# Altium PCB PCB1.PcbDoc
Units mm, origin at the board's own origin, x right, y up, seen from the top; angles counter-clockwise.
Board outline 89 x 90 mm, 2 copper layers (Top Layer, Bottom Layer); 46 components, 42 nets, 228 pads, 0 vias.
Unrouted connection lines stored in the file: 1.
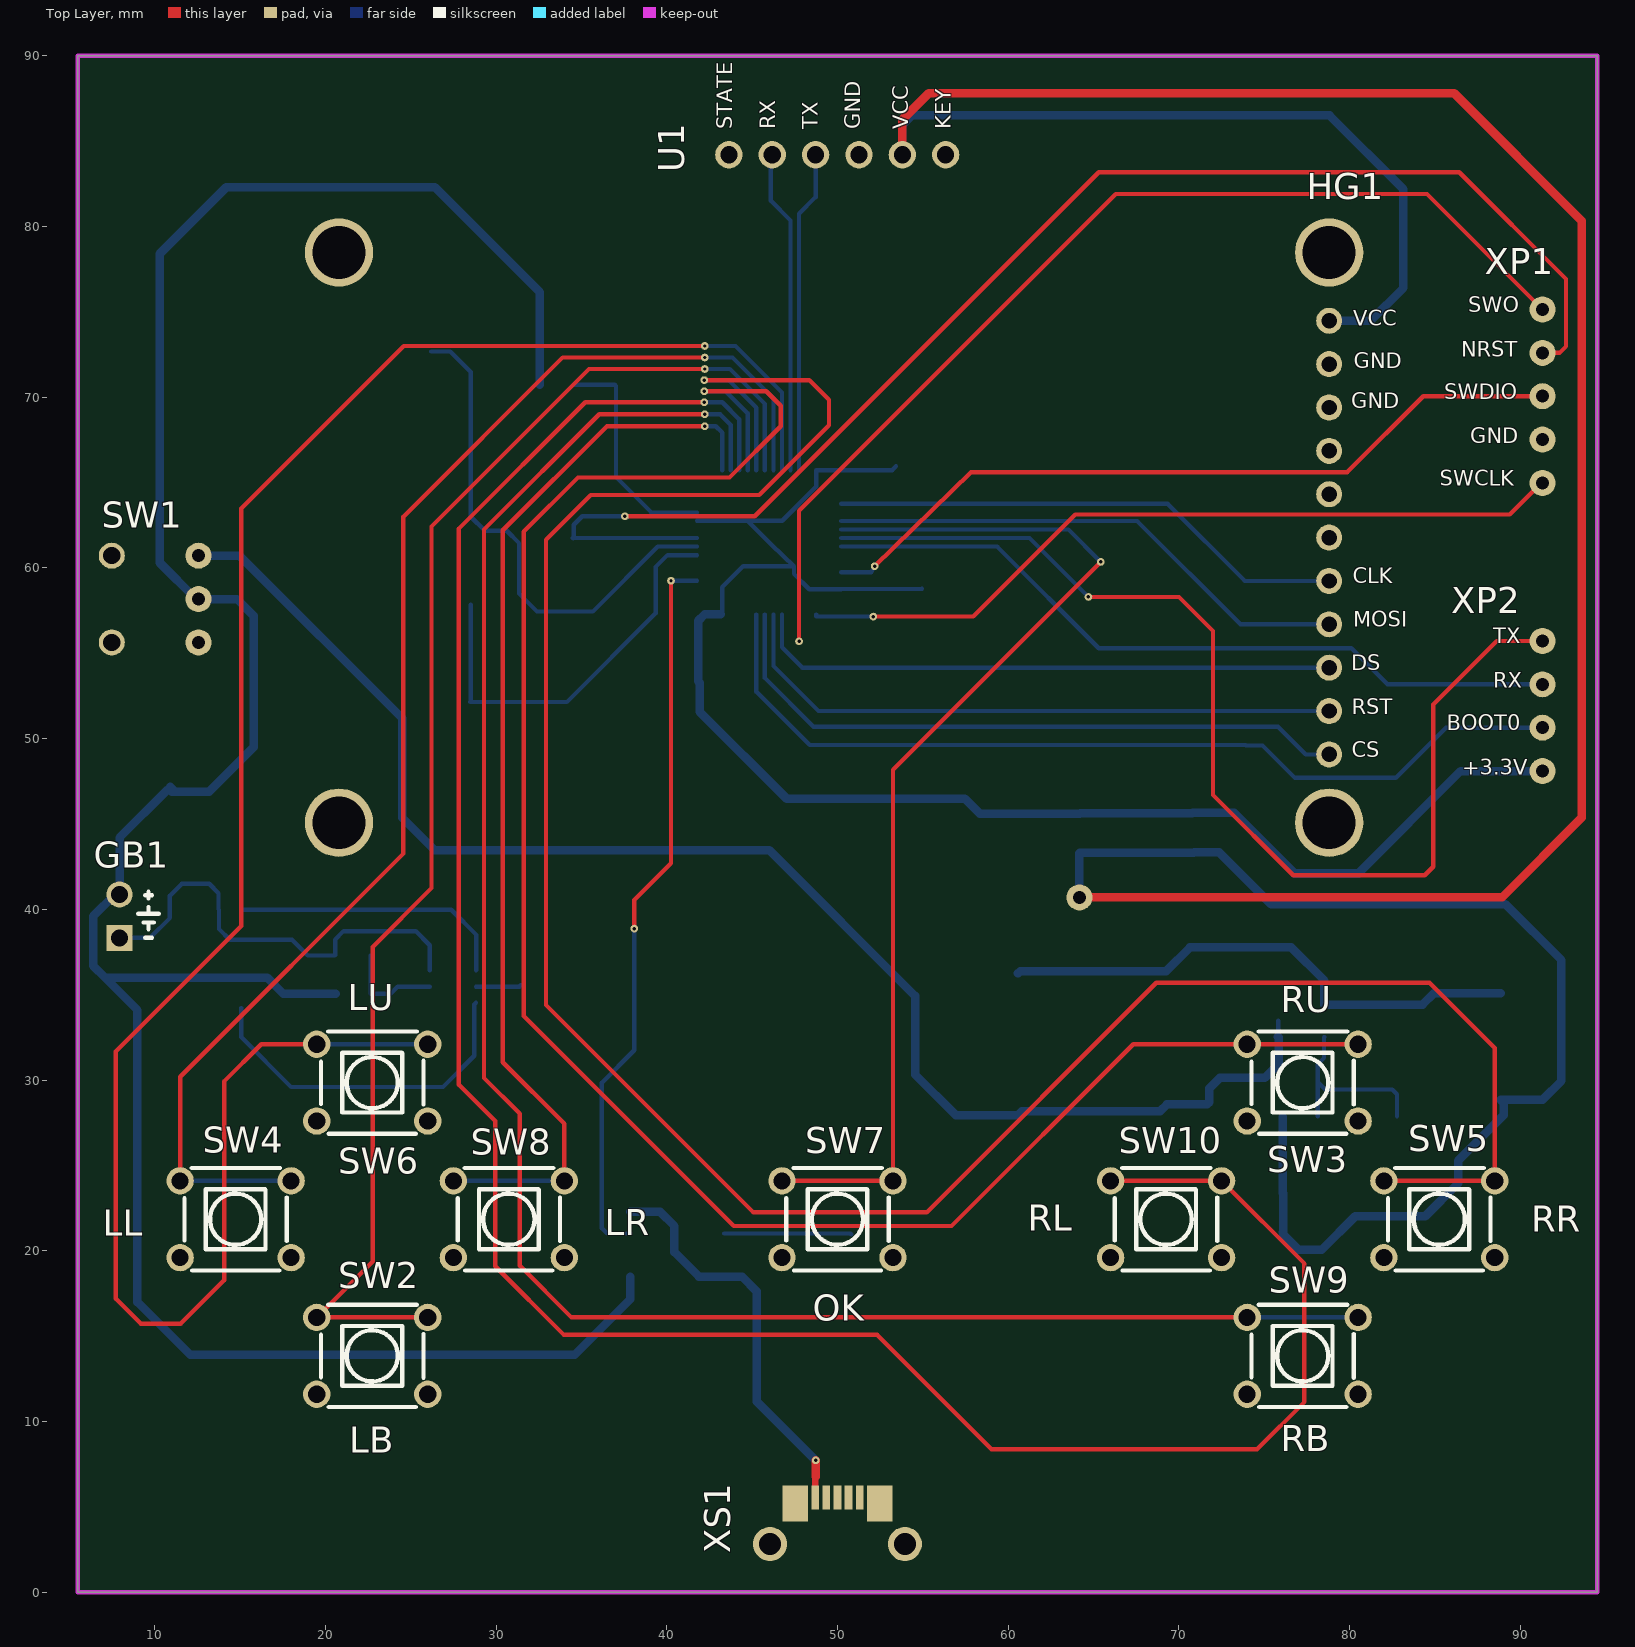
[diagram p0: Top Layer view]
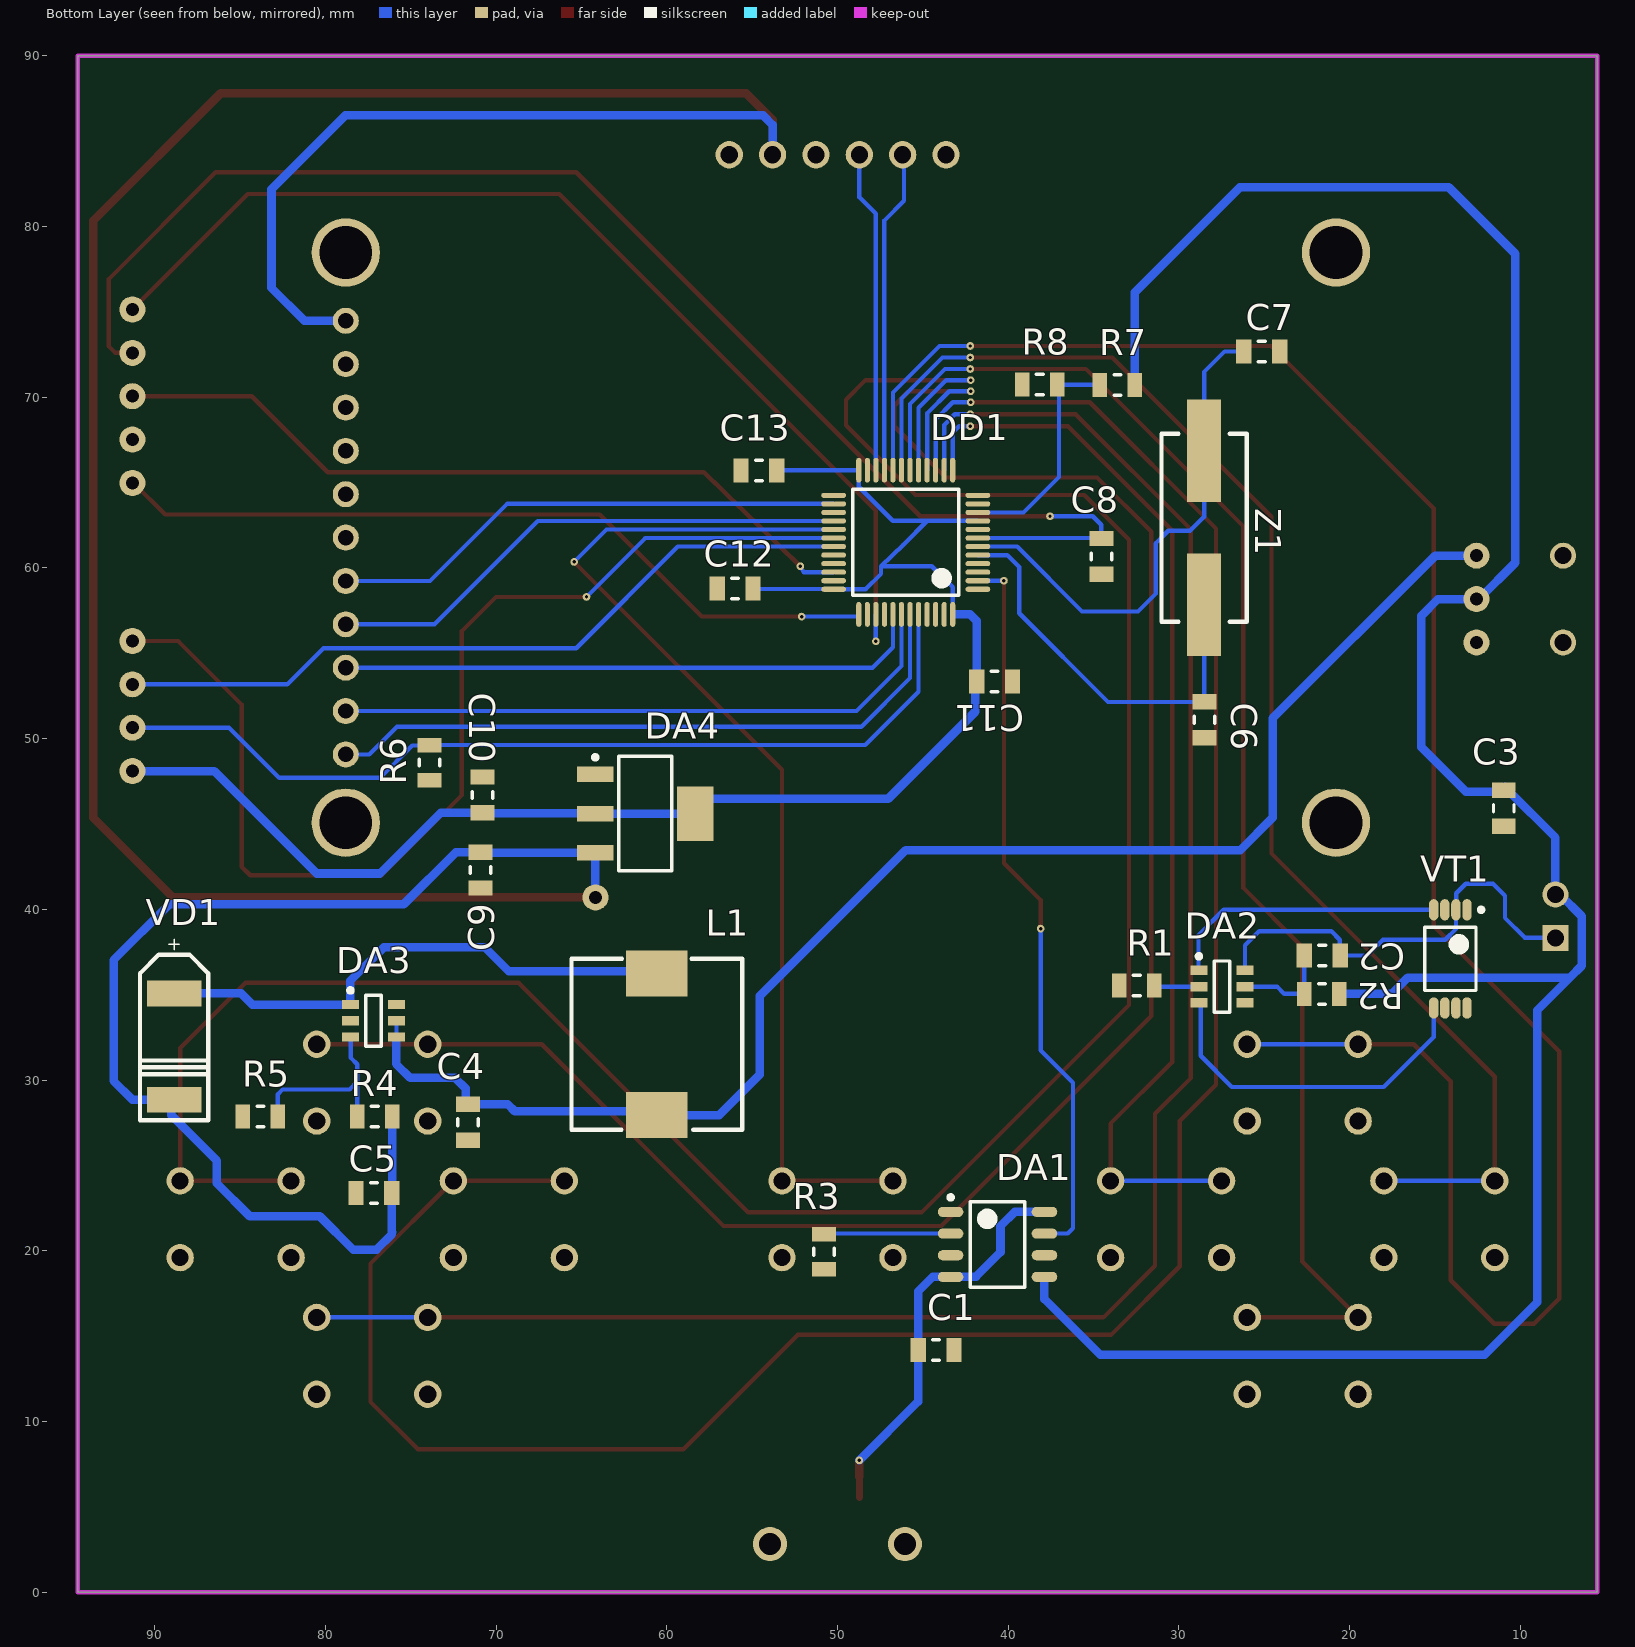
[diagram p1: Bottom Layer view, seen from below]

## Layer stack, top to bottom
Top Solder: solder mask 0.0102, Solder Resist, Dk 3.5
Top Layer: signal copper 0.0356
Dielectric 1: dielectric 0.32, FR-4, Dk 4.8
Bottom Layer: signal copper 0.0356
Bottom Solder: solder mask 0.0102, Solder Resist, Dk 3.5

## Board outline
5.5,0 5.5,90 94.5,90 94.5,0

## Design rules (kind name [scope] priority, off if disabled: settings)
BoardOutlineClearance [All] p1: gap=0.4 ignorepadtopadclearanceinfootprint=FALSE
Clearance [All] p1: gap=0.2 ignorepadtopadclearanceinfootprint=TRUE
PolygonConnect [All] p1: connectstyle=Relief reliefconductorwidth=0.254 reliefentries=4 polygonreliefangle="90 Angle" airgapwidth=0.254
RoutingVias [All] p1: holewidth=0.2 width=1.27 viastyle="Through Hole" minholewidth=0.2 minwidth=1.27 maxholewidth=0.2 maxwidth=1.27
SolderMaskExpansion [All] p1: expansion=0.102 istentingtop=FALSE
Width Width_1 [InNetClass('Power')] p1: maxlimit=0.5 minlimit=0.254 preferedwidth=0.5 checkconnectedcopper=TRUE
Width [InNetClass('AllOther')] p2: maxlimit=0.254 minlimit=0.254 preferedwidth=0.254
30 further rules are at their usual default settings.

## Classes and differential pairs
net class AllOther: NetC2_1 NetC2_2 NetC4_2 NetC6_2 NetC7_2 NetC8_2 NetDA1_2 NetDA1_7 NetDA2_1 NetDA2_2 NetDA2_3 NetDA3_1 NetDA3_3 NetDD1_10 NetDD1_13 NetDD1_14 NetDD1_15 NetDD1_16 NetDD1_17 NetDD1_18 NetDD1_19 NetDD1_20 NetDD1_21 NetDD1_22 NetDD1_26 NetDD1_28 NetDD1_29 NetDD1_30 NetDD1_31 NetDD1_34 NetDD1_37 NetDD1_39 NetDD1_41 NetDD1_42 NetDD1_44 NetVT1_1
net class Power: GND NetC1_2 NetC3_2 NetC4_2 NetC5_2 NetC10_2 NetDA3_1
component class Sheet3: C1 C2 C3 C4 C5 C6 C7 C8 C9 C10 C11 C12 C13 DA1 DA2 DA3 DA4 DD1 GB1 L1 R1 R2 R3 R4 R5 R6 R7 R8 SW1 SW2 SW3 SW4 SW5 SW6 SW7 SW8 SW9 SW10 U1 VD1 VT1 XS1 Z1
component class Sheet1: HG1 XP1 XP2

## Components (designator, comment, footprint, x,y, rotation, side; value= is the part's Value field where it differs from the comment)
C1 "0.1uF" CAPC2112X13N 44.225,14.2 r0 bottom
C2 "0.1uF" CAPC2112X13N 21.6,37.3 r0 bottom
C3 "10uF" CAPC2112X13N 10.975,45.925 r90 bottom
C4 "22uF" CAPC2112X13N 71.65,27.525 r90 bottom
C5 "22uF" CAPC2112X13N 77.15,23.375 r180 bottom
C6 "22pF" CAPC2112X13N 28.5,51.1 r90 bottom
C7 "22pF" CAPC2112X13N 25.15,72.675 r0 bottom
C8 "0.1uF" CAPC2112X13N 34.525,60.675 r90 bottom
C9 "10uF" CAPC2112X13N 70.9,42.3 r90 bottom
C10 "10uF" CAPC2112X13N 70.8,46.7 r270 bottom
C11 "0.1uF" CAPC2112X13N 40.8,53.35 r0 bottom
C12 "0.1uF" CAPC2112X13N 56,58.8 r180 bottom
C13 "0.1uF" CAPC2112X13N 54.6,65.7 r180 bottom
DA1 "TP4056" SOP127P600X173-8N 40.625,20.375 r180 bottom
DA2 "DA?" SOT-23-6 27.475,35.475 r180 bottom
DA3 "MT3608" SOT-23-6 77.175,33.475 r180 bottom
DA4 "NCP1117" SOT230P700X180-4N 61.262,45.606 r180 bottom
DD1 "STM32F103C8T6 (LQFP48)" TSQFP50P900X900X160-48N 46,61.5 r0 bottom
GB1 "Batt Li-On" BATT 7.95,38.335 r0 top
HG1 "TFT_SPI" LCD_TFT_SPI 78.8,45.075 r0 top locked
L1 "22uH" "inductor SMD" 60.575,27.95 r90 bottom
R1 "1k" RESC2113X06N 32.475,35.55 r0 bottom
R2 "100" RESC2113X06N 21.625,35.05 r0 bottom
R3 "1.2k" RESC2113X06N 50.8,19.95 r90 bottom
R4 "Резистор 0805" RESC2113X06N 77.1,27.875 r180 bottom
R5 "Резистор 0805" RESC2113X06N 83.8,27.875 r180 bottom
R6 "100k" RESC2113X06N 73.9,48.6 r90 bottom
R7 "47k" RESC2113X06N 33.6,70.725 r180 bottom
R8 "47k" RESC2113X06N 38.15,70.75 r180 bottom
SW1 "SWITCH" Switch 7.495,55.635 r0 top
SW2 "Button" PCBComponent_1 19.5,11.6 r0 top
SW3 "Button" PCBComponent_1 74,27.6 r0 top
SW4 "Button" PCBComponent_1 11.5,19.6 r0 top
SW5 "Button" PCBComponent_1 82,19.6 r0 top
SW6 "Button" PCBComponent_1 19.5,27.6 r0 top
SW7 "Button" PCBComponent_1 46.75,19.6 r0 top
SW8 "Button" PCBComponent_1 27.5,19.6 r0 top
SW9 "Button" PCBComponent_1 74,11.6 r0 top
SW10 "Button" PCBComponent_1 66,19.6 r0 top
U1 "HC-05" HC-05 56.34,84.2 r90 top locked
VD1 "SS34" SS34 88.85,28.85 r90 bottom
VT1 "FS8205A(MOSFET,TSSOP-8)" TSOP65P600X120-8N 14.1,37.1 r270 bottom
XP1 "SWD" SWD 91.3,64.975 r90 top
XP2 "UART" UART 91.3,48.1 r90 top
XS1 "USB" USB_Type2 53.95,2.825 r90 top
Z1 "Quartz" HC-49SM 28.525,57.85 r90 bottom

## Footprints (in the part's own frame and the unit in brackets; to place one, negate y for a bottom-side part, rotate by r counter-clockwise, add the part's x,y. Pads: shape width x height; smd on the part's side, far side on the other; paste and mask are expansions set on the pad)
BATT [mil]
  round 60 hole 39.37: 1(0,100)
  rect 60x60 hole 39.37: 2(0,0)
  silkscreen extent 43,0 91,106
CAPC2112X13N [mm] "Chip Capacitor, 2-Leads, Body 2,10x1,25mm, IPC Medium Density"
  rect 0.9x1.4 smd: 1(-1.05,0) 2(1.05,0)
  silkscreen extent -0.2,-0.6 0.2,0.6, body extent -1.1,-0.63 1.1,0.63, height 1.3
HC-05 [mm]
  round 1.6 hole 1: 1(0,12.7) 2(0,10.16) 3(0,7.62) 4(0,5.08) 5(0,2.54) 6(0,0)
HC-49SM [mm]
  rect 6x2 smd: 1(0,0) 2(9,0)
  silkscreen extent -1,-2.5 10,2.5
"inductor SMD" [mm]
  rect 2.7x3.6 smd: 1(0,0) 2(8.3,0)
  silkscreen extent -0.85,-5 9.15,5
LCD_TFT_SPI [mm]
  round 1.524 hole 0.9: 1(0,29.4) 2(0,24.32) 2(0,26.86) 3(0,14.16) 4(0,11.62) 5(0,9.08) 6(0,6.54) 7(0,4) 10(0,16.7) 10(0,19.24) 87(0,21.78)
  round 4 hole 3.1: 90(-58,0) 90(-58,33.4)
  round 4 hole 3.1 unplated: 90(0,0) 90(0,33.4)
PCBComponent_1 [mm]
  round 1.6 hole 1: 1(0,0) 1(6.5,0) 2(0,4.5) 2(6.5,4.5)
  silkscreen extent 0.25,-0.75 6.25,5.25
RESC2113X06N [mm] "Chip Resistor, 2-Leads, Body 2,10x1,30mm, IPC Medium Density"
  rect 0.85x1.4 smd: 1(-1.025,0) 2(1.025,0)
  silkscreen extent -0.2,-0.6 0.2,0.6, body extent -1.1,-0.7 1.1,0.7, height 0.55
SOP127P600X173-8N [mm] "SOP, 8-Leads, Body 4,90x3,91mm, Pitch 1,27mm, IPC Medium Density"
  oval 1.5x0.6 smd: 1(-2.75,1.905) 2(-2.75,0.635) 3(-2.75,-0.635) 4(-2.75,-1.905) 5(2.75,-1.905) 6(2.75,-0.635) 7(2.75,0.635) 8(2.75,1.905)
  silkscreen extent -2.88,-2.5 1.6,2.88, body extent -2,-2.5 2,2.5, height 1.73
SOT230P700X180-4N [mm] "SOT223, 4-Leads, Body 6,50x7,00mm (avg), Pitch 2,30mm, IPC Medium Density"
  rect 2.15x0.9 smd: 1(-2.925,-2.3) 2(-2.925,0) 3(-2.925,2.3)
  rect 2.15x3.2 smd: 2(2.925,0)
  silkscreen extent -3.05,-3.35 1.55,3.42, body extent -3.5,-3.35 3.5,3.35, height 1.8
SOT-23-6 [mm] "SOT23, 6-Leads, Body 2,85x2,80mm, Pitch 0,95mm, IPC Medium Density"
  rect 1x0.55 smd: 1(-1.35,0.95) 2(-1.35,0) 3(-1.35,-0.95) 4(1.35,-0.95) 5(1.35,0) 6(1.35,0.95)
  silkscreen extent -1.48,-1.5 0.45,1.9, body extent -0.85,-1.5 0.85,1.5, height 1.35
SS34 [mm]
  rect 1.52x3.2 smd: 1(6.225,0) 2(0,0)
  silkscreen extent -1.2,-2 9.4,2
SWD [mil]
  round 60 hole 30: 0(0,0) 1(100,0) 2(200,0) 3(300,0) 4(400,0)
Switch [mil]
  round 60 hole 30: 1(200,100) 2(200,200) 3(200,0)
  round 60 hole 39.37: 94(0,0) 94(0,200)
TSOP65P600X120-8N [mm] "TSOP, 8-Leads, Body 2,93x4,40mm, Pitch 0,65mm, IPC Medium Density"
  oval 1.25x0.55 smd: 1(-2.875,0.975) 1(2.875,0.975) 2(-2.875,0.325) 3(-2.875,-0.325) 4(-2.875,-0.975) 5(2.875,-0.975) 6(2.875,-0.325) 7(2.875,0.325)
  silkscreen extent -3,-1.5 1.85,1.92, body extent -2.25,-1.5 2.25,1.5, height 1.2
TSQFP50P900X900X160-48N [mm] "TSQFP, 48-Leads, Body 7,00x7,00mm, Pitch 0,50mm, IPC Medium Density"
  oval 1.45x0.3 smd: 1(-4.225,2.75) 2(-4.225,2.25) 3(-4.225,1.75) 4(-4.225,1.25) 5(-4.225,0.75) 6(-4.225,0.25) 7(-4.225,-0.25) 8(-4.225,-0.75) 9(-4.225,-1.25) 10(-4.225,-1.75) 11(-4.225,-2.25) 12(-4.225,-2.75) 25(4.225,-2.75) 26(4.225,-2.25) 27(4.225,-1.75) 28(4.225,-1.25) 29(4.225,-0.75) 30(4.225,-0.25) 31(4.225,0.25) 32(4.225,0.75) 33(4.225,1.25) 34(4.225,1.75) 35(4.225,2.25) 36(4.225,2.75)
  oval 0.3x1.45 smd: 13(-2.75,-4.225) 14(-2.25,-4.225) 15(-1.75,-4.225) 16(-1.25,-4.225) 17(-0.75,-4.225) 18(-0.25,-4.225) 19(0.25,-4.225) 20(0.75,-4.225) 21(1.25,-4.225) 22(1.75,-4.225) 23(2.25,-4.225) 24(2.75,-4.225) 37(2.75,4.225) 38(2.25,4.225) 39(1.75,4.225) 40(1.25,4.225) 41(0.75,4.225) 42(0.25,4.225) 43(-0.25,4.225) 44(-0.75,4.225) 45(-1.25,4.225) 46(-1.75,4.225) 47(-2.25,4.225) 48(-2.75,4.225)
  silkscreen extent -3.1,-3.1 3.1,3.1, body extent -3.5,-3.5 3.5,3.5, height 1.6
UART [mil]
  round 60 hole 30: 0(100,0) 1(0,0) 2(300,0) 3(200,0)
USB_Type2 [mm]
  rect 1.38x0.45 smd: 1(2.725,5.25) 2(2.725,4.6) 3(2.725,3.95) 4(2.725,3.3) 5(2.725,2.65)
  round 2 hole 1.3 unplated: 5(0,7.9) 5(0,0)
  rect 2.1x1.475 smd: 5(2.375,6.425) 5(2.375,1.475)

## Part data
C3 C4 C5 C6 C7 C9 C10: library part 0.1uF
DA2: library part DW01A
DA3: "DC-DC Up converter (SOT23-6)"
L1: library part Inductor
R1 R2 R3 R6 R7 R8: library part "Резистор 0805"
VD1: "Диод Шоттки 3A 40V"
VT1: "N-Channel MOSFET TSSOP-8"

## Free pads (board coordinates)
  round 0.45 hole 0.2: 96(37.55,63.025) 96(38.1,38.875) 96(40.25,59.25) 96(42.2,69.7) 96(42.2,70.35) 96(42.2,71) 96(42.225,71.65) 96(42.225,68.3) 96(42.225,69) 96(42.225,72.325) 96(42.225,73) 96(47.75,55.7) 96(48.725,7.725) 96(52.1,57.15) 96(52.175,60.1) 96(64.7,58.3) 96(65.425,60.35)
  round 1.524 hole 0.762: 98(64.175,40.7)

## Nets (pads, with @x,y where several pads share a name; then routed paths per layer and width w, separated by ;. In a path a pad name is that pad's centre, name@x,y a point inside that pad or via, vN(x,y) a via of type N, cw(c..) or ccw(c..) an arc to the next point about the centre after c; other vN are vias at no path point)
GND: C1.1 C3.1 C4.1 C5.1 C6.1 C7.1 C8.1 C9.1 C10.1 C11.1 C12.1 C13.1 DA1.1 DA1.3 DA3.2 DA4.3 DD1.8 DD1.23 DD1.35 DD1.47 HG1.2 HG1.90 R1.2 R3.1 R5.1 R6.1 R8.1 SW1.94 SW2.1 SW3.1 SW4.1 SW5.1 SW6.1 SW7.1 SW8.1 SW9.1 SW10.1 U1.4 VT1.6 XP1.1 XS1.5
NetC1_2: C1.2 DA1.4 DA1.8 pad.96@48.725,7.725 XS1.1 | length 23.7
  Top Layer w0.254: XS1.1 XS1.1@48.712,5.562 ; pad.96@48.712,7.712 pad.96@48.725,7.725
  Top Layer w0.4: XS1.1 48.7,6.75
  Top Layer w0.5: 48.725,6.769 pad.96@48.725,7.725
  Bottom Layer w0.5: DA1.8 39.62,22.28 40.45,21.45 40.45,19.925 41.886,18.489 43.356,18.489 DA1.4 44.43,18.47 45.275,17.625 C1.2 45.275,11.175 pad.96@48.725,7.725
NetC2_1: C2.1 DA2.6 GB1.2 VT1.2 | length 26.1
  Bottom Layer w0.254: GB1.2 9.735,38.335 10.9,39.5 10.9,40.8 11.6,41.5 13.2,41.5 13.75,40.95 13.75,40 VT1.2 13.775,38.85 14.4,38.225 18.05,38.225 18.975,37.3 C2.1 20.575,37.325 20.575,38.225 21.075,38.725 25.3,38.725 26.125,37.9 DA2.6
NetC2_2: C2.2 DA2.5 R2.2 | length 5.9
  Bottom Layer w0.254: C2.2 R2.2 23.825,35.05 24.25,35.475 DA2.5
NetC3_2: C3.2 DA1.5 GB1.1 R2.1 R7.2 SW1.1 | length 150.8
  Bottom Layer w0.5: C3.2@10.925,47.175 11.1,47 10.95,47 C3.2@10.925,46.975 ; C3.2 C3.2@10.925,46.975 ; R2.1 17.55,35.05 16.6,36 7.1,36 ; R7.2 32.575,76.15 26.425,82.3 14.2,82.3 10.3,78.4 10.3,60.3 12.425,58.175 SW1.1 14.825,58.175 15.8,57.2 15.8,49.5 13.2,46.9 11,46.9 C3.2@10.925,46.975 ; DA1.5 37.875,17.175 34.6,13.9 12.1,13.9 9,17 9,34.1 7.1,36 ; 7.1,36 6.4,36.7 6.4,39.6 7.675,40.875 GB1.1 7.95,44.2 10.725,46.975 C3.2@10.925,46.975
NetC4_2: C4.2 DA3.4 DA3.5 L1.1 SW1.2 | length 87.2
  Bottom Layer w0.254: DA3.4 DA3.5
  Bottom Layer w0.5: SW1.2 14.985,60.715 24.5,51.2 24.5,45.375 26.4,43.475 43.875,43.475 46,43.475 54.55,34.925 54.55,30.325 56.925,27.95 L1.1 60.8,28.175 68.9,28.175 69.3,28.575 C4.2 71.775,28.7 71.775,29.507 72.393,30.125 75.025,30.125 75.85,30.95 75.85,32.5 DA3.4 DA3.4@75.8,32.55
NetC5_2: C5.2 C9.2 DA4.1 HG1.1 pad.98 R4.2 U1.5 VD1.2 | length 225.7
  Top Layer w0.5: U1.5 53.8,86.25 55.35,87.8 86.125,87.8 93.6,80.325 93.6,45.375 88.925,40.7 pad.98
  Bottom Layer w0.5: U1.5 53.8,85.95 54.35,86.5 78.825,86.5 83.15,82.175 83.15,76.4 81.225,74.475 HG1.1 ; pad.98 64.175,43.295 DA4.1 64.208,43.328 70.878,43.328 C9.2 72.35,43.35 75.4,40.3 89.125,40.3 92.4,37.025 92.4,29.95 91.3,28.85 VD1.2 89.025,28.675 89.025,27.95 86.35,25.275 86.35,23.95 84.425,22.025 80.325,22.025 78.375,20.075 77,20.075 76.1,20.975 C5.2 ; 76.075,21.1 76.087,21.087 ; C5.2@76.087,23.388 R4.2@76.087,27.862
NetC6_2: C6.2 DD1.5 Z1.1 | length 24.1
  Bottom Layer w0.254: Z1.1 28.525,52.175 C6.2 34.15,52.15 39.35,57.35 39.35,60.05 40.05,60.75 DD1.5
NetC7_2: C7.2 DD1.6 Z1.2 | length 30.1
  Bottom Layer w0.254: C7.2 27.325,72.675 28.525,71.475 Z1.2 28.525,63 29.35,62.175 30.626,62.175 31.35,61.451 31.35,58.5 32.4,57.45 35.675,57.45 39.475,61.25 DD1.6
NetC8_2: C8.2 DD1.7 pad.96@37.55,63.025 XP1.3 | length 82.8
  Top Layer w0.254: pad.96@37.55,63.025 45.15,63.025 65.3,83.175 86.425,83.175 92.675,76.925 92.675,72.975 92.295,72.595 XP1.3
  Bottom Layer w0.254: C8.2@34.5,61.75 C8.2 C8.2@34.55,61.75 ; pad.96@37.55,63.025 35.05,63.025 34.55,62.525 C8.2@34.55,61.75 ; DD1.7 C8.2@34.55,61.75
NetC10_2: C10.2 C11.2 C12.2 C13.2 DA4.2 DD1.9 DD1.24 DD1.36 DD1.48 XP2.1 | length 94.6
  Bottom Layer w0.254: DD1.9@41.775,62.762 44.738,62.762 ; DD1.48 43.25,58.875 44.475,60.1 47.45,60.1 ; C13.2@53.425,65.95 53.2,65.725 DD1.24 48.75,64.75 46.762,62.762 44.738,62.762 ; C12.2@54.95,58.775 DD1.36 48.35,58.75 47.45,59.65 47.45,60.1 ; 44.738,62.762 46.137,61.363 47.45,60.1
  Bottom Layer w0.5: DD1.48@43.15,57.275 42.218,57.275 41.85,56.907 C11.2 41.925,53.275 41.925,51.575 47.025,46.475 57.468,46.475 58.337,45.606 64.187,45.606 64.208,45.628 70.778,45.628 C10.2 73.25,45.65 76.8,42.1 80.5,42.1 86.5,48.1 XP2.1
NetDA1_2: DA1.2 R3.2 | length 7.4
  Bottom Layer w0.254: DA1.2 50.765,21.01 R3.2
NetDA1_7: DA1.7 DD1.2 pad.96@38.1,38.875 pad.96@40.25,59.25 | length 42.9
  Top Layer w0.254: pad.96@38.1,38.875 38.1,40.55 40.25,42.7 pad.96@40.25,59.25
  Bottom Layer w0.254: DA1.7 36.515,21.01 36.2,21.325 36.2,29.85 38.1,31.75 pad.96@38.1,38.875 ; pad.96@40.25,59.25 DD1.2
NetDA2_1: DA2.1 VT1.4 | length 16.5
  Bottom Layer w0.254: VT1.4 27.375,39.975 28.85,38.5 28.85,36.45 DA2.1
NetDA2_2: DA2.2 R1.1 | length 2.7
  Bottom Layer w0.254: DA2.2 31.375,35.475 R1.1
NetDA2_3: DA2.3 VT1.5 | length 20.5
  Bottom Layer w0.254: VT1.5 15.075,32.525 18,29.6 26.9,29.6 28.725,31.425 28.725,34.425 DA2.3
NetDA3_1: DA3.1 L1.2 VD1.1 | length 31.4
  Bottom Layer w0.5: L1.2 60.712,36.387 69.263,36.387 70.65,37.775 76.575,37.775 78.525,35.825 DA3.1 84.275,34.425 84.925,35.075 VD1.1
NetDA3_3: DA3.3 R4.1 R5.2 | length 11.1
  Bottom Layer w0.254: R4.1 78.125,29.9 ; DA3.3 78.5,32.5 78.5,31.3 78.125,30.925 78.125,29.9 ; R5.2 82.775,29.175 82.5,29.45 78.575,29.45 78.125,29.9
NetDD1_10: DD1.10 R7.1 R8.2 | length 13.4
  Bottom Layer w0.254: R7.1 36.95,70.725 37.025,70.65 37.025,65.325 39.1,63.25 DD1.10
NetDD1_13: DD1.13 pad.96@42.225,68.3 SW8.2 | length 63.8
  Top Layer w0.254: SW8.2@34,24.1 34,27.45 30.4,31.05 30.4,62.2 36.5,68.3 pad.96@42.225,68.3
  Bottom Layer w0.254: SW8.2@27.5,24.1 SW8.2@34,24.1 ; pad.96@42.225,68.3 42.875,68.3 43.25,67.925 DD1.13
NetDD1_14: DD1.14 pad.96@42.225,69 SW9.2 | length 114.5
  Top Layer w0.254: pad.96@42.225,69 36.05,69 29.3,62.25 29.3,30.125 31.4,28.025 31.4,19.125 34.425,16.1 SW9.2@74,16.1
  Bottom Layer w0.254: pad.96@42.225,69 43.125,69 43.75,68.375 DD1.14 ; SW9.2@74,16.1 SW9.2@80.5,16.1
NetDD1_15: DD1.15 pad.96@42.2,69.7 SW10.2 | length 141.4
  Top Layer w0.254: pad.96@42.2,69.7 35.225,69.7 27.825,62.3 27.825,29.725 29.95,27.6 29.95,19.1 33.975,15.075 52.325,15.075 59.025,8.375 74.575,8.375 77.35,11.15 77.35,19.25 72.5,24.1 SW10.2@66,24.1
  Bottom Layer w0.254: pad.96@42.2,69.7 43.25,69.7 44.25,68.7 DD1.15
NetDD1_16: DD1.16 pad.96@42.2,70.35 SW3.2 | length 116.8
  Top Layer w0.254: pad.96@42.2,70.35 45.825,70.35 46.675,69.5 46.675,68.3 43.675,65.3 34.8,65.3 31.625,62.125 31.625,33.75 43.925,21.45 56.675,21.45 67.325,32.1 74,32.1 SW3.2@80.5,32.1
  Bottom Layer w0.254: pad.96@42.2,70.35 43.45,70.35 44.75,69.05 DD1.16
NetDD1_17: DD1.17 pad.96@42.2,71 SW5.2 | length 145.3
  Top Layer w0.254: pad.96@42.2,71 48.35,71 49.5,69.85 49.5,68.35 45.425,64.275 35.55,64.275 32.925,61.65 32.925,34.4 45.075,22.25 55.225,22.25 68.675,35.7 84.675,35.7 88.5,31.875 88.5,24.1 SW5.2@82,24.1
  Bottom Layer w0.254: pad.96@42.2,71 43.625,71 45.25,69.375 DD1.17
NetDD1_18: DD1.18 pad.96@42.225,71.65 SW2.2 | length 83.7
  Top Layer w0.254: SW2.2@26,16.1 19.5,16.1 22.775,19.375 22.775,37.8 26.225,41.25 26.225,62.425 35.45,71.65 pad.96@42.225,71.65
  Bottom Layer w0.254: pad.96@42.225,71.65 43.7,71.65 45.75,69.6 DD1.18
NetDD1_19: DD1.19 pad.96@42.225,72.325 SW4.2 | length 81.5
  Top Layer w0.254: SW4.2@11.5,24.1 11.5,30.2 24.575,43.275 24.575,63 33.9,72.325 pad.96@42.225,72.325
  Bottom Layer w0.254: SW4.2@11.5,24.1 SW4.2@18,24.1 ; pad.96@42.225,72.325 43.85,72.325 46.25,69.925 DD1.19
NetDD1_20: DD1.20 pad.96@42.225,73 SW6.2 | length 123.1
  Top Layer w0.254: SW6.2@19.5,32.1 16.25,32.1 14.075,29.925 14.075,18.275 11.525,15.725 9.2,15.725 7.725,17.2 7.725,31.675 15.075,39.025 15.075,63.475 24.6,73 pad.96@42.225,73
  Bottom Layer w0.254: SW6.2@19.5,32.1 SW6.2@26,32.1 ; pad.96@42.225,73 44.025,73 46.75,70.275 DD1.20
NetDD1_21: DD1.21 U1.2 | length 19
  Bottom Layer w0.254: U1.2 46.1,84.12 46.1,81.5 47.25,80.35 DD1.21
NetDD1_22: DD1.22 U1.3 | length 18.9
  Bottom Layer w0.254: DD1.22 47.75,80.75 48.72,81.72 U1.3
NetDD1_26: DD1.26 HG1.3 | length 30.4
  Bottom Layer w0.254: DD1.26 69.35,63.75 73.865,59.235 HG1.3
NetDD1_28: DD1.28 HG1.4 | length 31.1
  Bottom Layer w0.254: DD1.28 67.55,62.75 73.605,56.695 HG1.4
NetDD1_29: DD1.29 pad.96@65.425,60.35 SW7.2 | length 63.8
  Top Layer w0.254: SW7.2@46.75,24.1 53.25,24.1 53.25,48.175 pad.96@65.425,60.35
  Bottom Layer w0.254: DD1.29 63.525,62.25 pad.96@65.425,60.35
NetDD1_30: DD1.30 pad.96@64.7,58.3 XP2.2 | length 66.1
  Top Layer w0.254: pad.96@64.7,58.3 70,58.3 72,56.3 72,46.7 76.7,42 84.4,42 84.9,42.5 84.9,52 88.62,55.72 XP2.2
  Bottom Layer w0.254: DD1.30 61.25,61.75 pad.96@64.7,58.3
NetDD1_31: DD1.31 XP2.3 | length 44.4
  Bottom Layer w0.254: DD1.31 59.35,61.25 65.3,55.3 80.1,55.3 82.22,53.18 XP2.3
NetDD1_34: DD1.34 pad.96@52.175,60.1 XP1.2 | length 45.4
  Top Layer w0.254: pad.96@52.175,60.1 57.825,65.6 79.85,65.6 84.305,70.055 XP1.2
  Bottom Layer w0.254: DD1.34 51.975,59.75 pad.96@52.175,60.1
NetDD1_37: DD1.37 pad.96@52.1,57.15 XP1.0 | length 45.9
  Top Layer w0.254: pad.96@52.1,57.15 57.95,57.15 63.925,63.125 89.375,63.125 91.225,64.975 XP1.0
  Bottom Layer w0.254: DD1.37 48.75,57.171 48.771,57.15 pad.96@52.1,57.15
NetDD1_39: DD1.39 pad.96@47.75,55.7 XP1.4 | length 63.3
  Top Layer w0.254: pad.96@47.75,55.7 47.75,63.35 66.3,81.9 84.535,81.9 XP1.4
  Bottom Layer w0.254: pad.96@47.75,55.7 DD1.39
NetDD1_41: DD1.41 HG1.5 | length 34.5
  Bottom Layer w0.254: DD1.41 46.75,55.35 47.945,54.155 HG1.5
NetDD1_42: DD1.42 HG1.6 | length 36.7
  Bottom Layer w0.254: DD1.42 46.25,54.25 48.885,51.615 HG1.6
NetDD1_43: DD1.43 HG1.7 | length 38.6
  Bottom Layer w0.254: DD1.43 45.75,53.55 48.6,50.7 75.8,50.7 77.425,49.075 HG1.7
NetDD1_44: DD1.44 R6.2 XP2.0 | length 53.9
  Bottom Layer w0.254: DD1.44 45.25,52.75 48.375,49.625 R6.2 73.925,49.6 74.9,49.6 76.8,47.7 82.7,47.7 85.64,50.64 XP2.0
NetVT1_1: VT1.1
pads on no net: DA1.6 DA2.4 DA3.6 DD1.1 DD1.3 DD1.4 DD1.11 DD1.12 DD1.25 DD1.27 DD1.32 DD1.33 DD1.38 DD1.40 DD1.45 DD1.46 HG1.10 HG1.87 SW1.3 U1.1 U1.6 VT1.3 VT1.7 XS1.2 XS1.3 XS1.4

## Polygon pours and split planes (outlines as drawn)
GND on Top Layer "Top Layer-No Net1" (solid, shelved, pour order 5): 5.5,0 5.5,90 94.5,90 94.5,0
GND on Bottom Layer "Top Layer-No Net" (solid, shelved, pour order 4): 5.5,0 5.5,90 94.5,90 94.5,0

## Keep-outs
Keep-Out Layer:
  the board outline again, w0.254

## Silkscreen, mask and mechanical layers (free items; w line width, h text height)
Top Overlay:
  text "LU" at 21.325,34.1 h1.52
  text "RU" at 75.975,33.975 h1.52
  text "RL" at 61.15,21.175 h1.52
  text "RR" at 90.65,21.125 h1.52
  text "LR" at 36.375,20.9 h1.52
  text "LL" at 6.975,20.875 h1.52
  text "OK" at 48.55,15.9 h1.52
  text "RB" at 75.975,8.275 h1.52
  text "LB" at 21.4,8.175 h1.52
Mechanical 1:
  lines w0.254: 5.5,20.125 5.5,66.925

## Text inside footprints (layer, text, board x,y; h text height)
HG1: Top Overlay "CS" at 80.125,48.625 h1.52; Top Overlay "RST" at 80.125,51.125 h1.52; Top Overlay "DS" at 80.1,53.725 h1.52; Top Overlay "MOSI" at 80.225,56.275 h1.52; Top Overlay "CLK" at 80.175,58.8 h1.52; Top Overlay "GND" at 80.1,69.05 h1.52; Top Overlay "GND" at 80.25,71.4 h1.52; Top Overlay "VCC" at 80.2,73.9 h1.52
U1: Top Overlay "KEY" at 56.94,85.7 h1.52 r90; Top Overlay "VCC" at 54.44,85.7 h1.52 r90; Top Overlay "GND" at 51.64,85.7 h1.52 r90; Top Overlay "TX" at 49.14,85.7 h1.52 r90; Top Overlay "RX" at 46.64,85.7 h1.52 r90; Top Overlay "STATE" at 44.14,85.7 h1.52 r90
XP1: Top Overlay "SWCLK" at 85.275,64.525 h1.52; Top Overlay "GND" at 87.075,67 h1.52; Top Overlay "SWDIO" at 85.55,69.575 h1.52; Top Overlay "NRST" at 86.525,72.075 h1.52; Top Overlay "SWO" at 86.95,74.675 h1.52
XP2: Top Overlay "RX" at 88.4,52.7 h1.52; Top Overlay "TX" at 88.4,55.3 h1.52; Top Overlay "+3.3V" at 86.6,47.6 h1.52; Top Overlay "BOOT0" at 85.7,50.2 h1.52